# Altium PCB touch_control.PcbDoc
Units mm, origin at the board's own origin, x right, y up, seen from the top; angles counter-clockwise.
Board outline 175 x 30 mm, 4 copper layers (Top Layer, Int1 (Guard), Int2 (PWR), Bottom Layer), stack 1.573 mm thick; 30 components, 34 nets, 130 pads, 5 vias.
Unrouted connection lines stored in the file: 83.
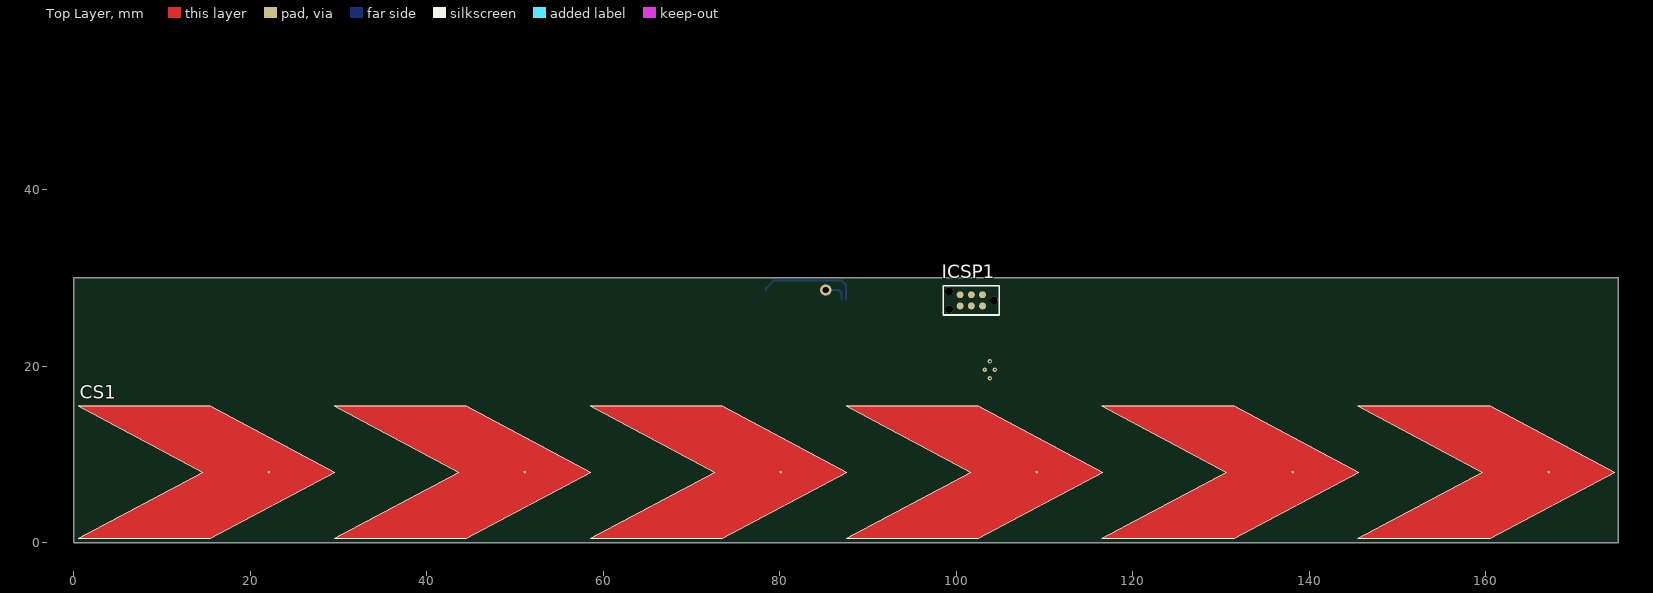
[diagram p0: Top Layer view]
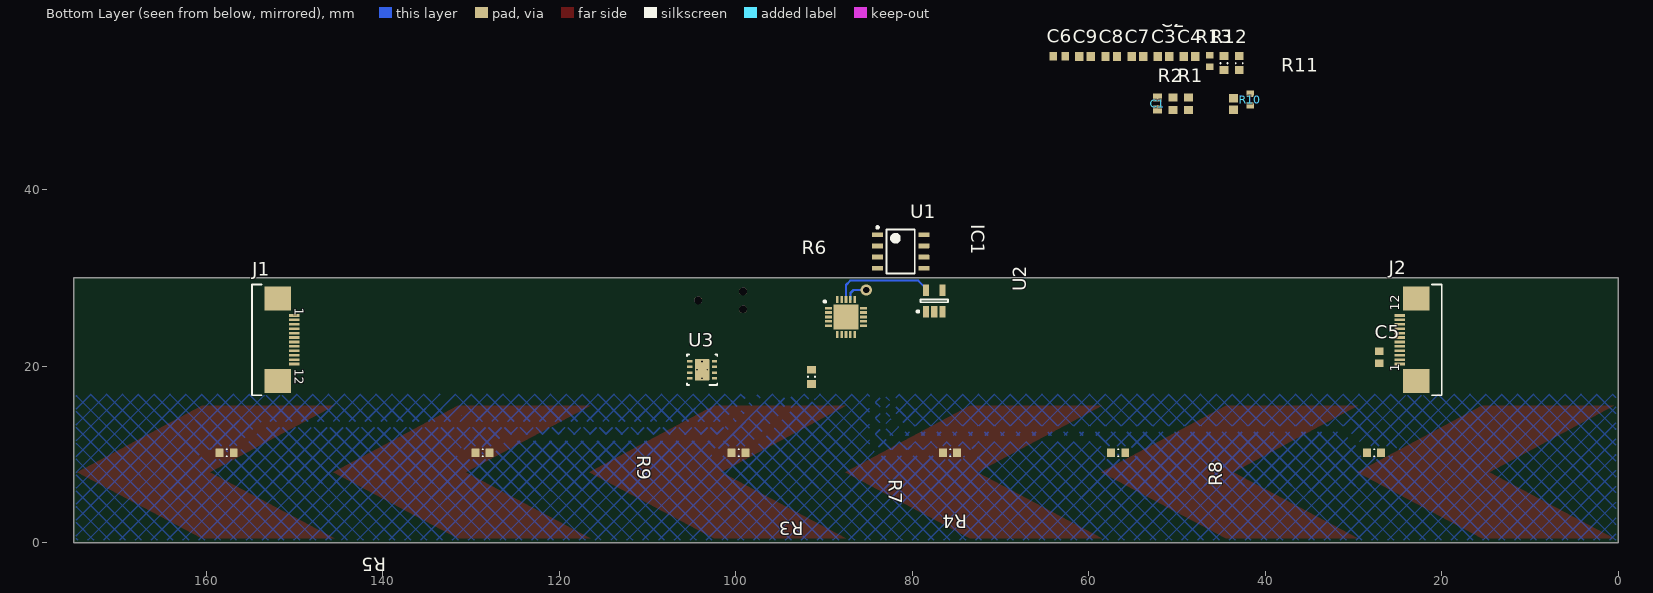
[diagram p1: Bottom Layer view, seen from below]
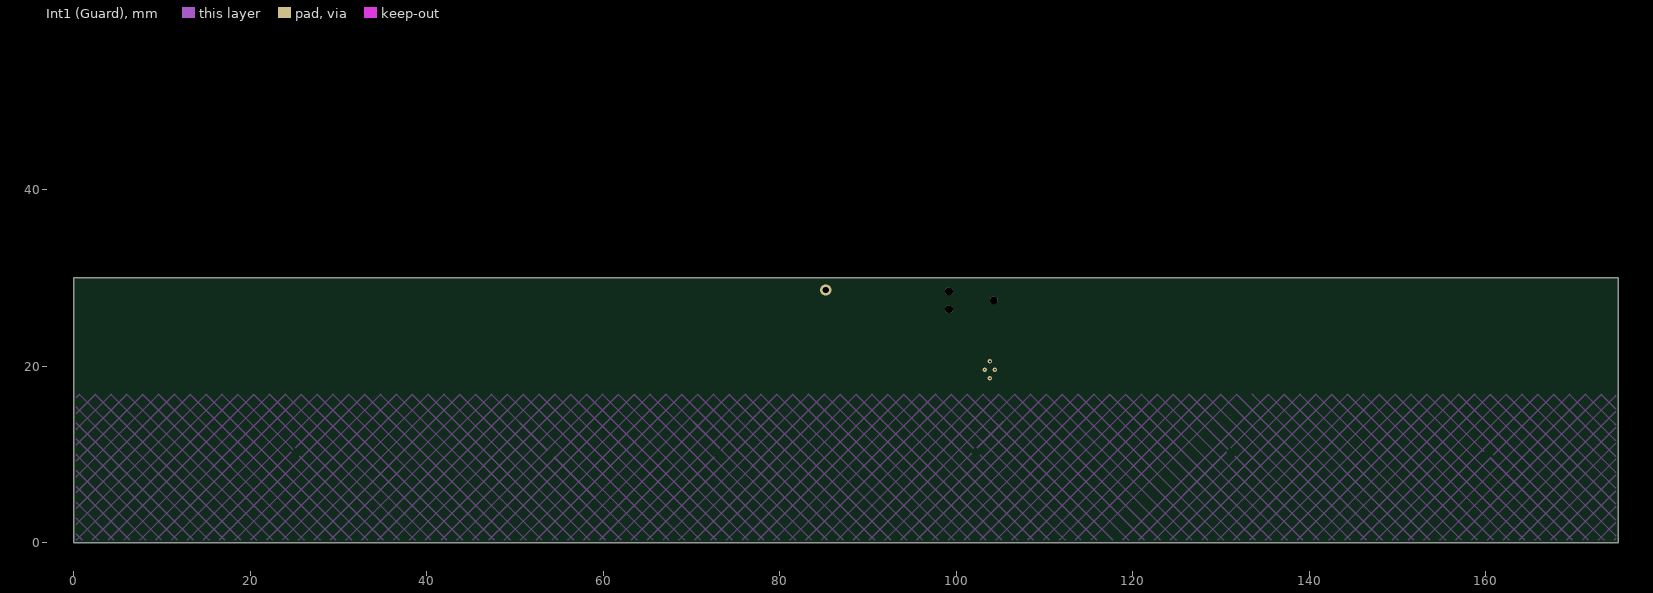
[diagram p2: Int1 (Guard)]
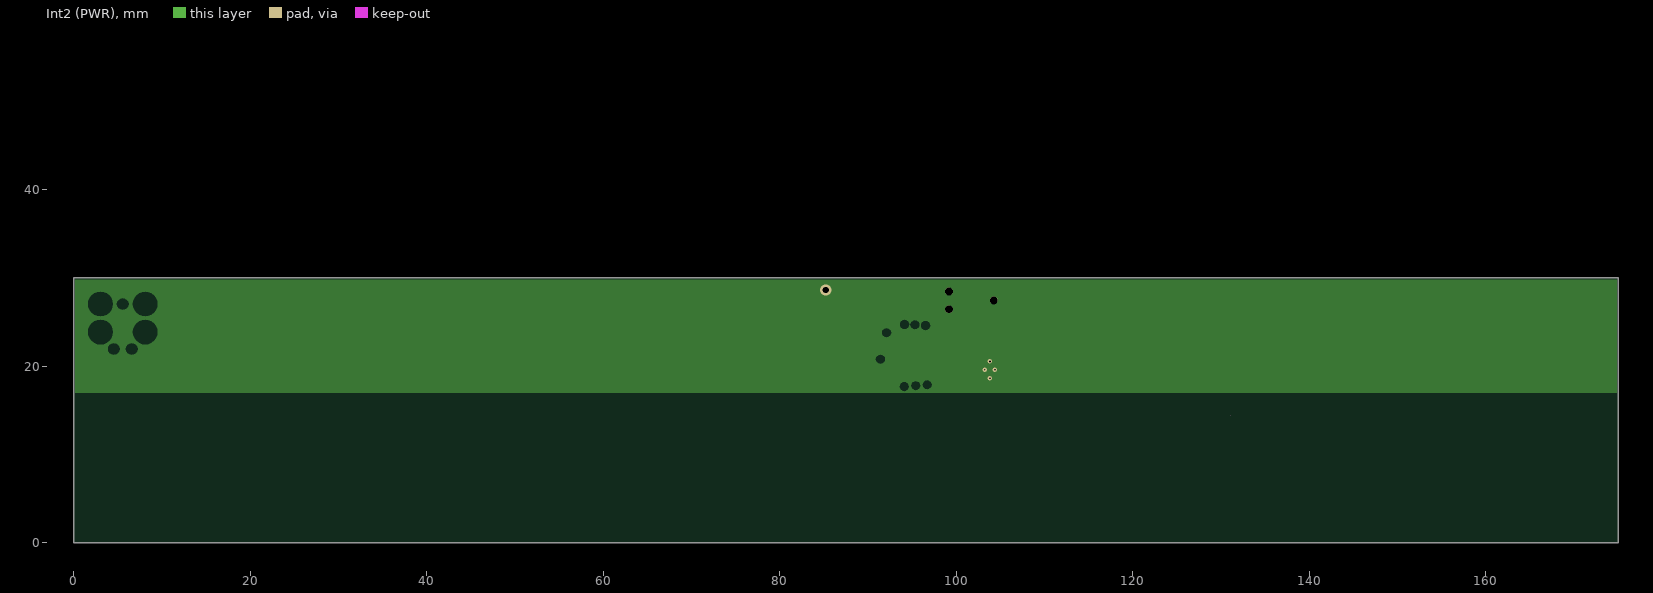
[diagram p3: Int2 (PWR)]

## Layer stack, top to bottom
Top Solder: solder mask 0.0254, SM-001, Dk 4
Top Layer: signal copper 0.035
Dielectric 1: prepreg 0.1803, PP-021, Dk 4.7
Dielectric 2: prepreg 0.1803, PP-021, Dk 4.7
Int1 (Guard): signal copper 0.035
Dielectric 3: core 0.7112, Core-039, Dk 4.8
Int2 (PWR): signal copper 0.035
Dielectric 4: prepreg 0.1803, PP-021, Dk 4.7
Dielectric 5: prepreg 0.1803, PP-021, Dk 4.7
Bottom Layer: signal copper 0.035
Bottom Solder: solder mask 0.0254, SM-001, Dk 4

## Board outline
0,0 175,0 175,30 0,30
cut-out: 131.1,14.4

## Design rules (kind name [scope] priority, off if disabled: settings)
BoardOutlineClearance [All] p1: gap=0.2 ignorepadtopadclearanceinfootprint=FALSE except(0.4: Arc-SplitBarrior Arc-SplitContinuation Track-SplitBarrior Track-SplitContinuation SMDPad-SplitBarrior SMDPad-SplitContinuation THPad-SplitBarrior THPad-SplitContinuation Via-SplitBarrior Via-SplitContinuation Fill-SplitBarrior Fill-SplitContinuation Poly-SplitBarrior Poly-SplitContinuation Region-SplitBarrior Region-SplitContinuation Text-SplitBarrior Text-SplitContinuation)
Clearance "Clearance Bottom Layer" [OnLayer('Bottom Layer')] p1: gap=0.203 ignorepadtopadclearanceinfootprint=TRUE except(0.254: Arc-Text Track-Text SMDPad-Text THPad-Text Via-Text Fill-Text Poly-Text Region-Text Text-Text)
Clearance "Clearance Top Layer" [OnLayer('Top Layer')] p2: gap=0.203 ignorepadtopadclearanceinfootprint=TRUE except(0.254: Arc-Text Track-Text SMDPad-Text THPad-Text Via-Text Fill-Text Poly-Text Region-Text Text-Text)
Clearance [All] p3: gap=0.2 ignorepadtopadclearanceinfootprint=FALSE except(0.089: Arc-Arc Arc-Track Arc-SMDPad Track-Track Track-SMDPad SMDPad-SMDPad; 0.127: Arc-Via Track-Via SMDPad-Via THPad-Via Via-Via; 0.254: Arc-Text Track-Text SMDPad-Text THPad-Text Via-Text Fill-Text Poly-Text Region-Text Text-Text)
DiffPairsRouting RS485 [InDifferentialPair('RS485')] p1: maxlimit=0.127 minlimit=0.127 mostfreqgap=0.127 toplayer_minwidth=0.157 toplayer_maxwidth=0.589 toplayer_prefwidth=0.157 midlayer1_minwidth=0.063 midlayer1_maxwidth=0.343 midlayer1_prefwidth=0.063 midlayer2_minwidth=0.063 midlayer2_maxwidth=0.343 midlayer2_prefwidth=0.063 bottomlayer_minwidth=0.157 bottomlayer_maxwidth=0.589 bottomlayer_prefwidth=0.157 impedanceprofiledriven=TRUE impedanceprofileid={A137A21B-FC63-43BB-B182-D2C5AB81EC2A} impedanceprofilevalue=100.000000 maxuncoupledlength=12.7
DiffPairsRouting [All] p2: maxlimit=0.254 minlimit=0.254 mostfreqgap=0.254 toplayer_minwidth=0.381 toplayer_maxwidth=0.381 toplayer_prefwidth=0.381 midlayer1_minwidth=0.381 midlayer1_maxwidth=0.381 midlayer1_prefwidth=0.381 midlayer2_minwidth=0.381 midlayer2_maxwidth=0.381 midlayer2_prefwidth=0.381 bottomlayer_minwidth=0.381 bottomlayer_maxwidth=0.381 bottomlayer_prefwidth=0.381 maxuncoupledlength=12.7
HoleSize [All] p1: absolutevalues=TRUE maxlimit=6.3 minlimit=0.2 maxpercent=80.000 minpercent=20.000
MinimumAnnularRing [All] p1: minimumring=0.076
MinimumSolderMaskSliver [All] p1: minsoldermaskwidth=0.1
PolygonConnect PolygonConnect_1 [All] p1: thpad.connectstyle=Relief thpad.reliefconductorwidth=0.508 thpad.reliefentries=4 thpad.polygonreliefangle="90 Angle" thpad.airgapwidth=0.254 smdpad.connectstyle=Relief smdpad.reliefconductorwidth=0.508 smdpad.reliefentries=4 smdpad.polygonreliefangle="90 Angle" smdpad.airgapwidth=0.254 via.connectstyle=Direct via.reliefconductorwidth=0.508 via.reliefentries=4 via.polygonreliefangle="90 Angle" via.airgapwidth=0.254
PolygonConnect [All] p2: connectstyle=Relief reliefconductorwidth=0.254 reliefentries=4 polygonreliefangle="90 Angle" airgapwidth=0.254
RoutingCorners [All] p1: cornerstyle=Round minsetback=2.54 maxsetback=2.54
RoutingVias [All] p1: holewidth=0.5 width=1 viastyle="Through Hole" minholewidth=0.2 minwidth=0.45 maxholewidth=1 maxwidth=2
SilkToSilkClearance [All] p1: silktosilkclearance=0.1
SilkToSolderMaskClearance [IsPad] p1: minsilkscreentomaskgap=0.1 clearancetoexposedcopper=TRUE
SolderMaskExpansion [All] p1: expansion=0.102
Width C_SENSE_WIDTH [InNetClass('C_SENSE')] p1: maxlimit=0.2 minlimit=0.1 preferedwidth=0.18
Width [All] p2: maxlimit=2.54 minlimit=0.089 preferedwidth=0.381
24 further rules are at their usual default settings.

## Classes and differential pairs
net class C_SENSE: CS0 CS1 CS2 CS3 CS4 CS5 GUARD GUARD_S NetCS1_1 NetCS1_2 NetCS1_3 NetCS1_4 NetCS1_5 NetCS1_6
net class CS[0..5]: CS0 CS1 CS2 CS3 CS4 CS5
differential pair RS485: +RS485_P -RS485_N

## Components (designator, comment, footprint, x,y, rotation, side; value= is the part's Value field where it differs from the comment)
C1 "1uF" CAPC1608X95X40NL15T15 52.2,49.765 r270 bottom
C2 "0.1uF" CAPC1608X95X40NL15T15 43.6,49.7 r270 bottom
C3 "0.1uF" CAPC1608X95X40NL15T15 51.525,55.09 r180 bottom
C4 "1uF" CAPC1608X95X40NL15T15 48.564,55.09 r180 bottom
C5 "10uF" CAPC1608X90X35NL10T15 27.1,21 r270 bottom
C6 "10uF" CAPC1608X90X35NL10T15 63.345,55.115 r180 bottom
C7 "1uF" CAPC1608X95X40NL15T15 54.487,55.09 r180 bottom
C8 "1uF" CAPC1608X95X40NL15T15 57.448,55.09 r180 bottom
C9 "0.1uF" CAPC1608X95X40NL15T15 60.409,55.09 r180 bottom
CS1 "Linear mTouch Slider" ? 0.5,15.5 r90 top
IC1 "PIC16LF1559-I_GZ" QFN50P400X400X55-21N-D 87.5,25.581 r180 bottom
ICSP1 "ICSP PIC" TC2030-MCP-NL 104.24,27.465 r180 top
J1 "68711214022" 68711214022 152.58,23 r270 bottom locked
J2 "68711214022" 68711214022 22.22,23 r90 bottom locked
R1 "3.3K" RESC1609X50X30ML08T20 48.703,49.74 r270 bottom
R2 "3.3K" RESC1609X50X30ML08T20 50.464,49.74 r90 bottom
R3 "10K" RESC0603(1608)_N 75.706,10.2 r180 bottom value="10000.00 Ohm"
R4 "10K" RESC0603(1608)_N 56.664,10.2 r180 bottom value="10000.00 Ohm"
R5 "10K" RESC0603(1608)_N 157.664,10.2 r180 bottom value="10000.00 Ohm"
R6 "10K" RESC0603(1608)_N 91.4,18.8 r270 bottom value="10000.00 Ohm"
R7 "10K" RESC0603(1608)_N 99.664,10.2 r180 bottom value="10000.00 Ohm"
R8 "10K" RESC0603(1608)_N 27.664,10.2 r180 bottom value="10000.00 Ohm"
R9 "10K" RESC0603(1608)_N 128.664,10.2 r180 bottom value="10000.00 Ohm"
R10 "330R" RESC1608X55X30LL15T15 41.7,50.2 r90 bottom
R11 "330R" RESC1608X55X30LL15T15 46.303,54.565 r90 bottom
R12 "100R" RESC0603(1608)_N 42.956,54.34 r90 bottom value="10000.00 Ohm"
R13 "10K" RESC0603(1608)_N 44.667,54.34 r90 bottom value="10000.00 Ohm"
U1 "P82B715D" D0008A_L 81.3,33 r180 bottom
U2 "MCP1801T-3302I/OT" SOT-23-OT5_M 77.5,27.4 r90 bottom
U3 "SN65HVD75DRBT" DRB0008B_V 103.8,19.6 r0 bottom

## Footprints (in the part's own frame and the unit in brackets; to place one, negate y for a bottom-side part, rotate by r counter-clockwise, add the part's x,y. Pads: shape width x height; smd on the part's side, far side on the other; paste and mask are expansions set on the pad)
68711214022 [mm] "ZIF Connectors, Horizontal, Top Contact, pitch 0.5mm, 12p"
  rect 0.3x1.2 smd: 1(-2.75,2.56) 2(-2.25,2.56) 3(-1.75,2.56) 4(-1.25,2.56) 5(-0.75,2.56) 6(-0.25,2.56) 7(0.25,2.56) 8(0.75,2.56) 9(1.25,2.56) 10(1.75,2.56) 11(2.25,2.56) 12(2.75,2.56)
  rect 2.7x3 smd: MP1(-4.68,0.7) MP2(4.68,0.7)
  silkscreen extent -6.27,-2.22 6.28,-1.1, body extent -6.2,-2.15 6.2,2.95, height 2.1
CAPC1608X90X35NL10T15 [mm] "Chip Capacitor, 2-Leads, Body 1.60x0.80mm, IPC Medium Density"
  rect 0.85x0.95 smd: 1(-0.675,0) 2(0.675,0)
  body extent -0.85,-0.45 0.85,0.45, height 0.9
CAPC1608X95X40NL15T15 [mm] "Chip Capacitor, 2-Leads, Body 1.60x0.80mm, IPC Medium Density"
  rect 0.95x1 smd: 1(-0.65,0) 2(0.65,0)
  body extent -0.88,-0.48 0.87,0.47, height 0.95
D0008A_L [mm] "SOIC, 8-Leads, Body 5x4mm, Pitch 1.27mm, IPC High Density"
  rrect18% 1.25x0.55 smd: 1(-2.625,1.905) 2(-2.625,0.635) 3(-2.625,-0.635) 4(-2.625,-1.905) 5(2.625,-1.905) 6(2.625,-0.635) 7(2.625,0.635) 8(2.625,1.905)
  silkscreen extent -2.75,-2.5 1.6,2.85, body extent -3,-2.45 3,2.45, height 1.63
DRB0008B_V [mm] "SON, 8-Leads, Body 3x3mm, Pitch 0.65mm, Thermal Pad 2.4x1.65mm, TI Recommended"
  rrect33% 0.6x0.3 smd: 1(-1.4,0.975) 2(-1.4,0.325) 3(-1.4,-0.325) 4(-1.4,-0.975) 5(1.4,-0.975) 6(1.4,-0.325) 7(1.4,0.325) 8(1.4,0.975)
  rrect6% 1.65x2.4 smd paste-1.2: 9(0,0)
  silkscreen extent -1.73,-1.73 1.73,1.73, body extent -1.5,-1.5 1.5,1.5, height 0.96
QFN50P400X400X55-21N-D [mm]
  rect 0.8x0.3 smd: 1(-2,1) 2(-2,0.5) 3(-2,0) 4(-2,-0.5) 5(-2,-1) 11(2,-1) 12(2,-0.5) 13(2,0) 14(2,0.5) 15(2,1)
  rect 0.3x0.8 smd: 6(-1,-2) 7(-0.5,-2) 8(0,-2) 9(0.5,-2) 10(1,-2) 16(1,2) 17(0.5,2) 18(0,2) 19(-0.5,2) 20(-1,2)
  rect 2.8x2.8 smd: 21(0,0)
  silkscreen extent -2.53,1.63 -2.28,1.87, body extent -2.05,-2.05 2.05,2.05, height 0.55
RESC0603(1608)_N [mm] "Chip Resistor, Body 1.6x0.8mm, IPC Medium Density"
  rect 0.9x1 smd: 1(-0.8,0) 2(0.8,0)
  silkscreen extent -0.05,-0.4 0.05,0.4, body extent -0.85,-0.47 0.85,0.47, height 0.6
RESC1608X55X30LL15T15 [mm] "Chip Resistor, 2-Leads, Body 1.75x0.95mm, IPC High Density"
  rect 0.75x0.85 smd: 1(-0.65,0) 2(0.65,0)
  body extent -0.87,-0.48 0.88,0.48, height 0.55
RESC1609X50X30ML08T20 [mm] "Chip Resistor, 2-Leads, Body 1.65x0.95mm, IPC Low Density"
  rect 0.9x1.05 smd: 1(-0.7,0) 2(0.7,0)
  body extent -0.82,-0.48 0.82,0.48, height 0.5
SOT-23-OT5_M [mm] "SOT23, 5-Leads, Body 2.9x1.7mm, Pitch 0.95mm, Lead Span 2.8mm, IPC Low Density"
  rect 1.3x0.7 smd: 1(-1.2,0.95) 2(-1.2,0) 3(-1.2,-0.95) 4(1.2,-0.95) 5(1.2,0.95)
  silkscreen extent -1.32,-1.55 0.15,1.98, body extent -0.9,-1.55 0.9,1.55, height 1.45
TC2030-MCP-NL [mil]
  round 31 smd: 1(50,-25) 2(50,25) 3(100,-25) 4(100,25) 5(150,-25) 6(150,25)
  round 34 hole 35 unplated: A(0,0) B(200,40) C(200,-40)
  silkscreen extent -25,-65 225,65
? [mm]
  round 0.3 smd paste-0.15: 1(-7.5,-21.605) 2(-7.5,-50.605) 3(-7.5,-79.605) 4(-7.5,-108.605) 5(-7.5,-137.605) 6(-7.5,-166.605)
  Top Layer region: 0,-145 0,-160 -7.5,-174.105 -15,-160 -15,-145 -7.5,-159.105
  Top Layer region: 0,-116 0,-131 -7.5,-145.105 -15,-131 -15,-116 -7.5,-130.105
  Top Layer region: 0,-87 0,-102 -7.5,-116.105 -15,-102 -15,-87 -7.5,-101.105
  Top Layer region: 0,-58 0,-73 -7.5,-87.105 -15,-73 -15,-58 -7.5,-72.105
  Top Layer region: 0,-29 0,-44 -7.5,-58.105 -15,-44 -15,-29 -7.5,-43.105
  Top Layer region: 0,0 0,-15 -7.5,-29.105 -15,-15 -15,0 -7.5,-14.105
  silkscreen extent -15,-174.11 0,0

## Part data
C1 C4 C7 C8: library part CMP-2006-00046-1, Manufacturer=Vitramon, Part Number=VJ0603G105KXYCW1BC
C2 C3 C9: library part CMP-2006-01884-1, Manufacturer=Vitramon, Part Number=VJ0603Y104JXQCW1BC
C5 C6: library part CMP-2006-02792-1, Manufacturer=Murata, Part Number=GRM188R60J106ME47D
CS1: library part mTouchLinearSlider, ConfigurationParameters==__sensorid[ChevronSlider]=angle[75]=height[35]=splitWidth[5]=sliderWidth[20]=numDevices[6]=, ConfiguratorName=MICROCHIP_TOUCH
IC1: "Integrated Circuit", Manufacturer_Name=Microchip, Manufacturer_Part_Number=PIC16LF1559-I/GZ, Mouser Part Number=579-PIC16LF1559-I/GZ, Datasheet Link=http://ww1.microchip.com/downloads/en/DeviceDoc/40001761E.pdf, Height=0.55mm, Mouser Price/Stock=https://www.mouser.com/Search/Refine.aspx?Keyword=579-PIC16LF1559-I%2FGZ
J1 J2: library part CMP-1502-01552-1, "SMT ZIF Connectors WR-FPC, Horizontal, Top Contact, pitch 0.5 mm, 12 pins", Contact Resistance=20mOhm, Manufacturer="Wurth Elektronik", Operating Temperature=-25to85degC, Rated Current=0.5A, Withstanding Voltage=250VAC, Working Voltage=50VAC, Contact Design=TopContact, Datasheet URL=https://katalog.we-online.de/em/datasheet/68711214022.pdf, Manufacturer URL=http://www.we-online.de, Mounting Technology=SMT, Orientation=Horizontal, Package Reference=68711214022, Packaging=TapeandReel, Part Number=68711214022, Pin Number=12, Pitch=0.5mm, Publisher=WurthElektronik
R1 R2: library part CMP-2100-03614-1, "Chip Resistor, 3.3 KOhm, +/- 1%, 0.1 W, -55 to 155 degC, 0603 (1608 Metric), RoHS, Tape and Reel", Case/Package=0603, Case Code (Metric)=1608, Manufacturer="Vishay Semiconductor", Max Operating Temperature=155degC, Max Power Dissipation=100mW, Min Operating Temperature=-55degC, Package Description="2-Pin Surface Mount Device, Body 1.575 x 0.85 mm", Package Quantity=10, Resistance=3.3KOhm, Temperature Coefficient=100ppm/degreesC, Tolerance=1%, Voltage Rating=75V, Case Code (Imperial)=0603, Composition=ThickFilm, Contact Plating=Lead, Datasheet URL=http://www.vishay.com/docs/20035/dcrcwe3.pdf, Datasheet Version=41061.0, Depth=0.85mm, Height=0.45mm, Lead Free=LeadFree, Length=1.55mm, Manufacturer URL=http://www.vishay.com/, Military Standard=Not, Mount=SurfaceMount, Number of Terminations=2, Package Reference=0603, Packaging=TapeandReel, Power Rating=100mW, Radiation Hardening=No, REACH SVHC=Unknown, RoHSCompliant=true, Termination=SMD/SMT, Voltage Rating (DC)=75V, Weight=7.1E-05oz, Width=0.85mm
R3 R4 R5 R6 R7 R8 R9 R12 R13: library part CMP-1012-00623-1, "10K 0.1W 1% 0603 (1608 Metric)  SMD", Case-EIA=0603, Case-Metric=1608, Power="0.1 W", Tolerance="1 %", Technology=SMT
R10 R11: library part CMP-1665-00055-1, "Chip Resistor, 330 Ohm, +/- 1%, 0.1 W, -55 to 155 degC, 0603 (1608 Metric), RoHS, Tape and Reel", Current Rating="500 mA", Max Operating Temperature="85 degC", Min Operating Temperature="-25 degC", Package Quantity=1500, Voltage Rating="10 V", ComponentLink1Description="Manufacturer URL", ComponentLink1URL=http://www.panasonic.com/, ComponentLink2Description=Datasheet, ComponentLink2URL=http://industrial.panasonic.com/cdbs/www-data/pdf/RDA0000/AOA0000C86.pdf, Contact Finish=Gold, Contact Material=Copper, Contact Plating=Gold, DatasheetVersion=Apr-15, Gender=Male, Height="1.45 mm", Lead Pitch="1.1 mm", Length="13.7 mm", Mating Cycles=10000, Mount="Surface Mount", PackageDescription="2-Pin Surface Mount Device, Body 1.6 x 0.85 mm", PackageReference=0603, Packaging="Tape and Reel", Pins=8, REACH SVHC="No SVHC", RoHSCompliant=true, Width="1.45 mm"
U1: library part CMP-0314-00136-2, "I2C Bus Extender, 2 Channel Width, 3.0 to 12.0 V, -40 to 85 degC, 8-pin SOIC (D), Green (RoHS & no Sb/Br)", 5V Tolerant I/O=Yes, Manufacturer="Texas Instruments", Master Side I2C Bus Capacitance Supported(pF)=400, Channel Width=2, Code_JEDEC=MS-012AA, ComponentLink1Description=Datasheet, ComponentLink1URL=http://www.ti.com/general/docs/lit/getliterature.tsp?genericPartNumber=P82B715&fileType=pdf, DatasheetVersion=SCPS145A, Eco-Plan="Green (RoHS & no Sb/Br)", Max Frequency(kHz)=400, Mounting Technology="Surface Mount", Open Drain I/O Type=Yes, PackageDescription="8-Pin Plastic Small Outline Integrated Circuit, 4.9 x 3.9 mm, Pitch 1.27 mm Pitch", PackageReference=D0008A, PackageVersion="revM, Jun-2011", PartNumber=P82B715D, Slave Side I2C Bus Capacitance Supported(pF)=400, SubFamily="I2C Hub, Buffer, Repeater", VCC(Max)(V)=12, VCC(Min)(V)=3, Vcc range(V)="3.0 to 12.0"
U2: library part CMP-0136-00719-1, "150 mA, High PSRR, Low Quiescent Current LDO, 5-Pin SOT-23, Industrial Temperature, Tape and Reel", Code_IPC=SOT23-5, DatasheetVersion="revC, Jan-2009", PackageDescription="5-Lead Plastic Small Outline Transistor (OT) [SOT-23]", PackageReference=SOT-23-OT5, PackageVersion="revBB, Aug-2009"
U3: library part CMP-0694-00015-2, "3.3 V Supply RS-485 with IEC ESD Protection, 20 Mbps, -40 to 125 degC, 8-Pin SON, RoHS, Tape and Reel", Manufacturer="Texas Instruments", Operating Temperature Range="-40 to 125 degC", ComponentLink1Description="Manufacturer URL", ComponentLink1URL=http://www.ti.com/, ComponentLink2Description=Datasheet, ComponentLink2URL=http://www.ti.com/lit/ds/sllse11c/sllse11c.pdf, ComponentLink3Description="Package Specification", ComponentLink3URL=http://www.ti.com/lit/ds/sllse11c/sllse11c.pdf, DatasheetVersion=SLLSE11C, ESD="15 kV", ICC (Max) (mA)=0.95, Mounting Technology="Surface Mount", No. of RX=1, No. of TX=1, PackageDescription="8-Pin Plastic Small Outline No-Lead, Body 3 x 3 mm, Pitch 0.65 mm", PackageReference=DRB0008B, PackageVersion=4203482-2/K, Packing="Tape and Reel", PartNumber=SN65HVD75DRBT, RoHS=TRUE, Signaling Rate (Max) (Mbps)=20, VCC="3 to 3.6 V", VI="-7 to 12 V"

## Via types
v1: diameter 0.5, hole 0.2, Top Layer to Bottom Layer, 4 vias
v2: diameter 1.27, hole 0.711, Top Layer to Bottom Layer, 1 vias

## Nets (pads, with @x,y where several pads share a name; then routed paths per layer and width w, separated by ;. In a path a pad name is that pad's centre, name@x,y a point inside that pad or via, vN(x,y) a via of type N, cw(c..) or ccw(c..) an arc to the next point about the centre after c; other vN are vias at no path point)
+5: C3.2 C4.2 C5.2 C6.2 C7.2 J1.11 J1.12 J2.1 J2.2 U1.8 U2.1 U2.3
CS0: IC1.13 R8.1
CS1: IC1.12 R4.1
CS2: IC1.11 R3.1
CS3: IC1.5 R7.2
CS4: IC1.4 R9.2
CS5: IC1.3 R5.2
GND: C1.1 C2.1 C3.1 C4.1 C5.1 C6.1 C7.1 C8.1 C9.1 IC1.17 IC1.21 ICSP1.3 J1.1 J1.4 J1.7 J2.6 J2.9 J2.12 R13.2 U1.4 U2.2 U3.5 U3.9 | length 2.8
  Int2 (PWR) w0.254: v2@85.2,28.5 v2(85.2,28.65)
  Bottom Layer w0.254: v2(85.2,28.65) 86.65,28.65 87,28.3 IC1.17
  other v1: 103.8,18.65 103.225,19.6 104.375,19.6 103.8,20.55
GPIO0: IC1.19 J1.10 J2.3
GUARD: IC1.6 R6.1
GUARD_S: R6.2
M\C\L\R\/VPP: IC1.1 ICSP1.1
NetCS1_1: CS1.1 R8.2
NetCS1_2: CS1.2 R4.2
NetCS1_3: CS1.3 R3.2
NetCS1_4: CS1.4 R7.1
NetCS1_5: CS1.5 R9.1
NetCS1_6: CS1.6 R5.1
PGC: IC1.15 ICSP1.5
PGD: IC1.16 ICSP1.4
RS485_A: J1.2 J2.11
RS485_B: J1.3 J2.10
RS485_N: R12.1 U3.6
RS485_P: R12.2 U3.7
RTS: IC1.20 J1.8 J2.5 R13.1 U3.2 U3.3
RX: IC1.9 U3.1
SCL_LY: J1.5 J2.8 R11.1 U1.7
SCL_SY: IC1.8 R1.1 U1.6
SDA_LX: J1.6 J2.7 R10.1 U1.2
SDA_SX: IC1.10 R2.2 U1.3
SigIn0: IC1.14 J2.4
SigOut0: IC1.2 J1.9
TX: IC1.7 U3.4
VCC: C1.2 C2.2 C8.2 C9.2 IC1.18 ICSP1.2 R1.2 R2.1 R10.2 R11.2 U2.5 U3.8 | length 11.5
  Bottom Layer w0.254: U2.5 78.45,28.85 79.3,29.7 87.016,29.7 87.5,29.216 IC1.18
pads on no net: ICSP1.6 ICSP1.A ICSP1.B ICSP1.C J1.MP1 J1.MP2 J2.MP1 J2.MP2 U1.1 U1.5 U2.4

## Polygon pours and split planes (outlines as drawn)
GUARD_S on Int1 (Guard) "GUARD_S_L02_P002" (hatched 45Degree grid 1.27 track 0.18, pour order 2): 0,16.8 175,16.8 175,0 0,0
GUARD_S on Bottom Layer "GUARD_S_L04_P006" (hatched 45Degree grid 1.27 track 0.18, pour order 6): 0,16.8 175,16.8 175,0 0,0
GND on Int2 (PWR) "GND_L03_P004" (solid, pour order 4): 175,30 175,17 0,17 0,30

## Dimensions
0,0 to 19.995,16.725 on Mechanical 1
175,0 to 155.005,29.475 on Mechanical 1
0,30 to 0,0 on Mechanical 1
0,30 to 175,30 on Mechanical 1

## Text inside footprints (layer, text, board x,y; h text height)
J1: Bottom Overlay "1" at 149.97,26.6 h1.02 r90; Bottom Overlay "12" at 149.97,19.7 h1.02 r90
J2: Bottom Overlay "12" at 24.83,26.3 h1.02 r270; Bottom Overlay "1" at 24.83,19.4 h1.02 r270